# Altium PCB SJA1105Q_LAN8870_EVB_revA.PcbDoc (part 4 of 5)
Units mm, origin at the board's own origin, x right, y up, seen from the top; angles counter-clockwise.
Board outline 128 x 110 mm, 6 copper layers (Top Layer, Mid Layer 1, Mid Layer 2, Mid Layer 3, Mid Layer 4, Bottom Layer), stack 1.538 mm thick; 490 components, 327 nets, 1659 pads, 519 vias.
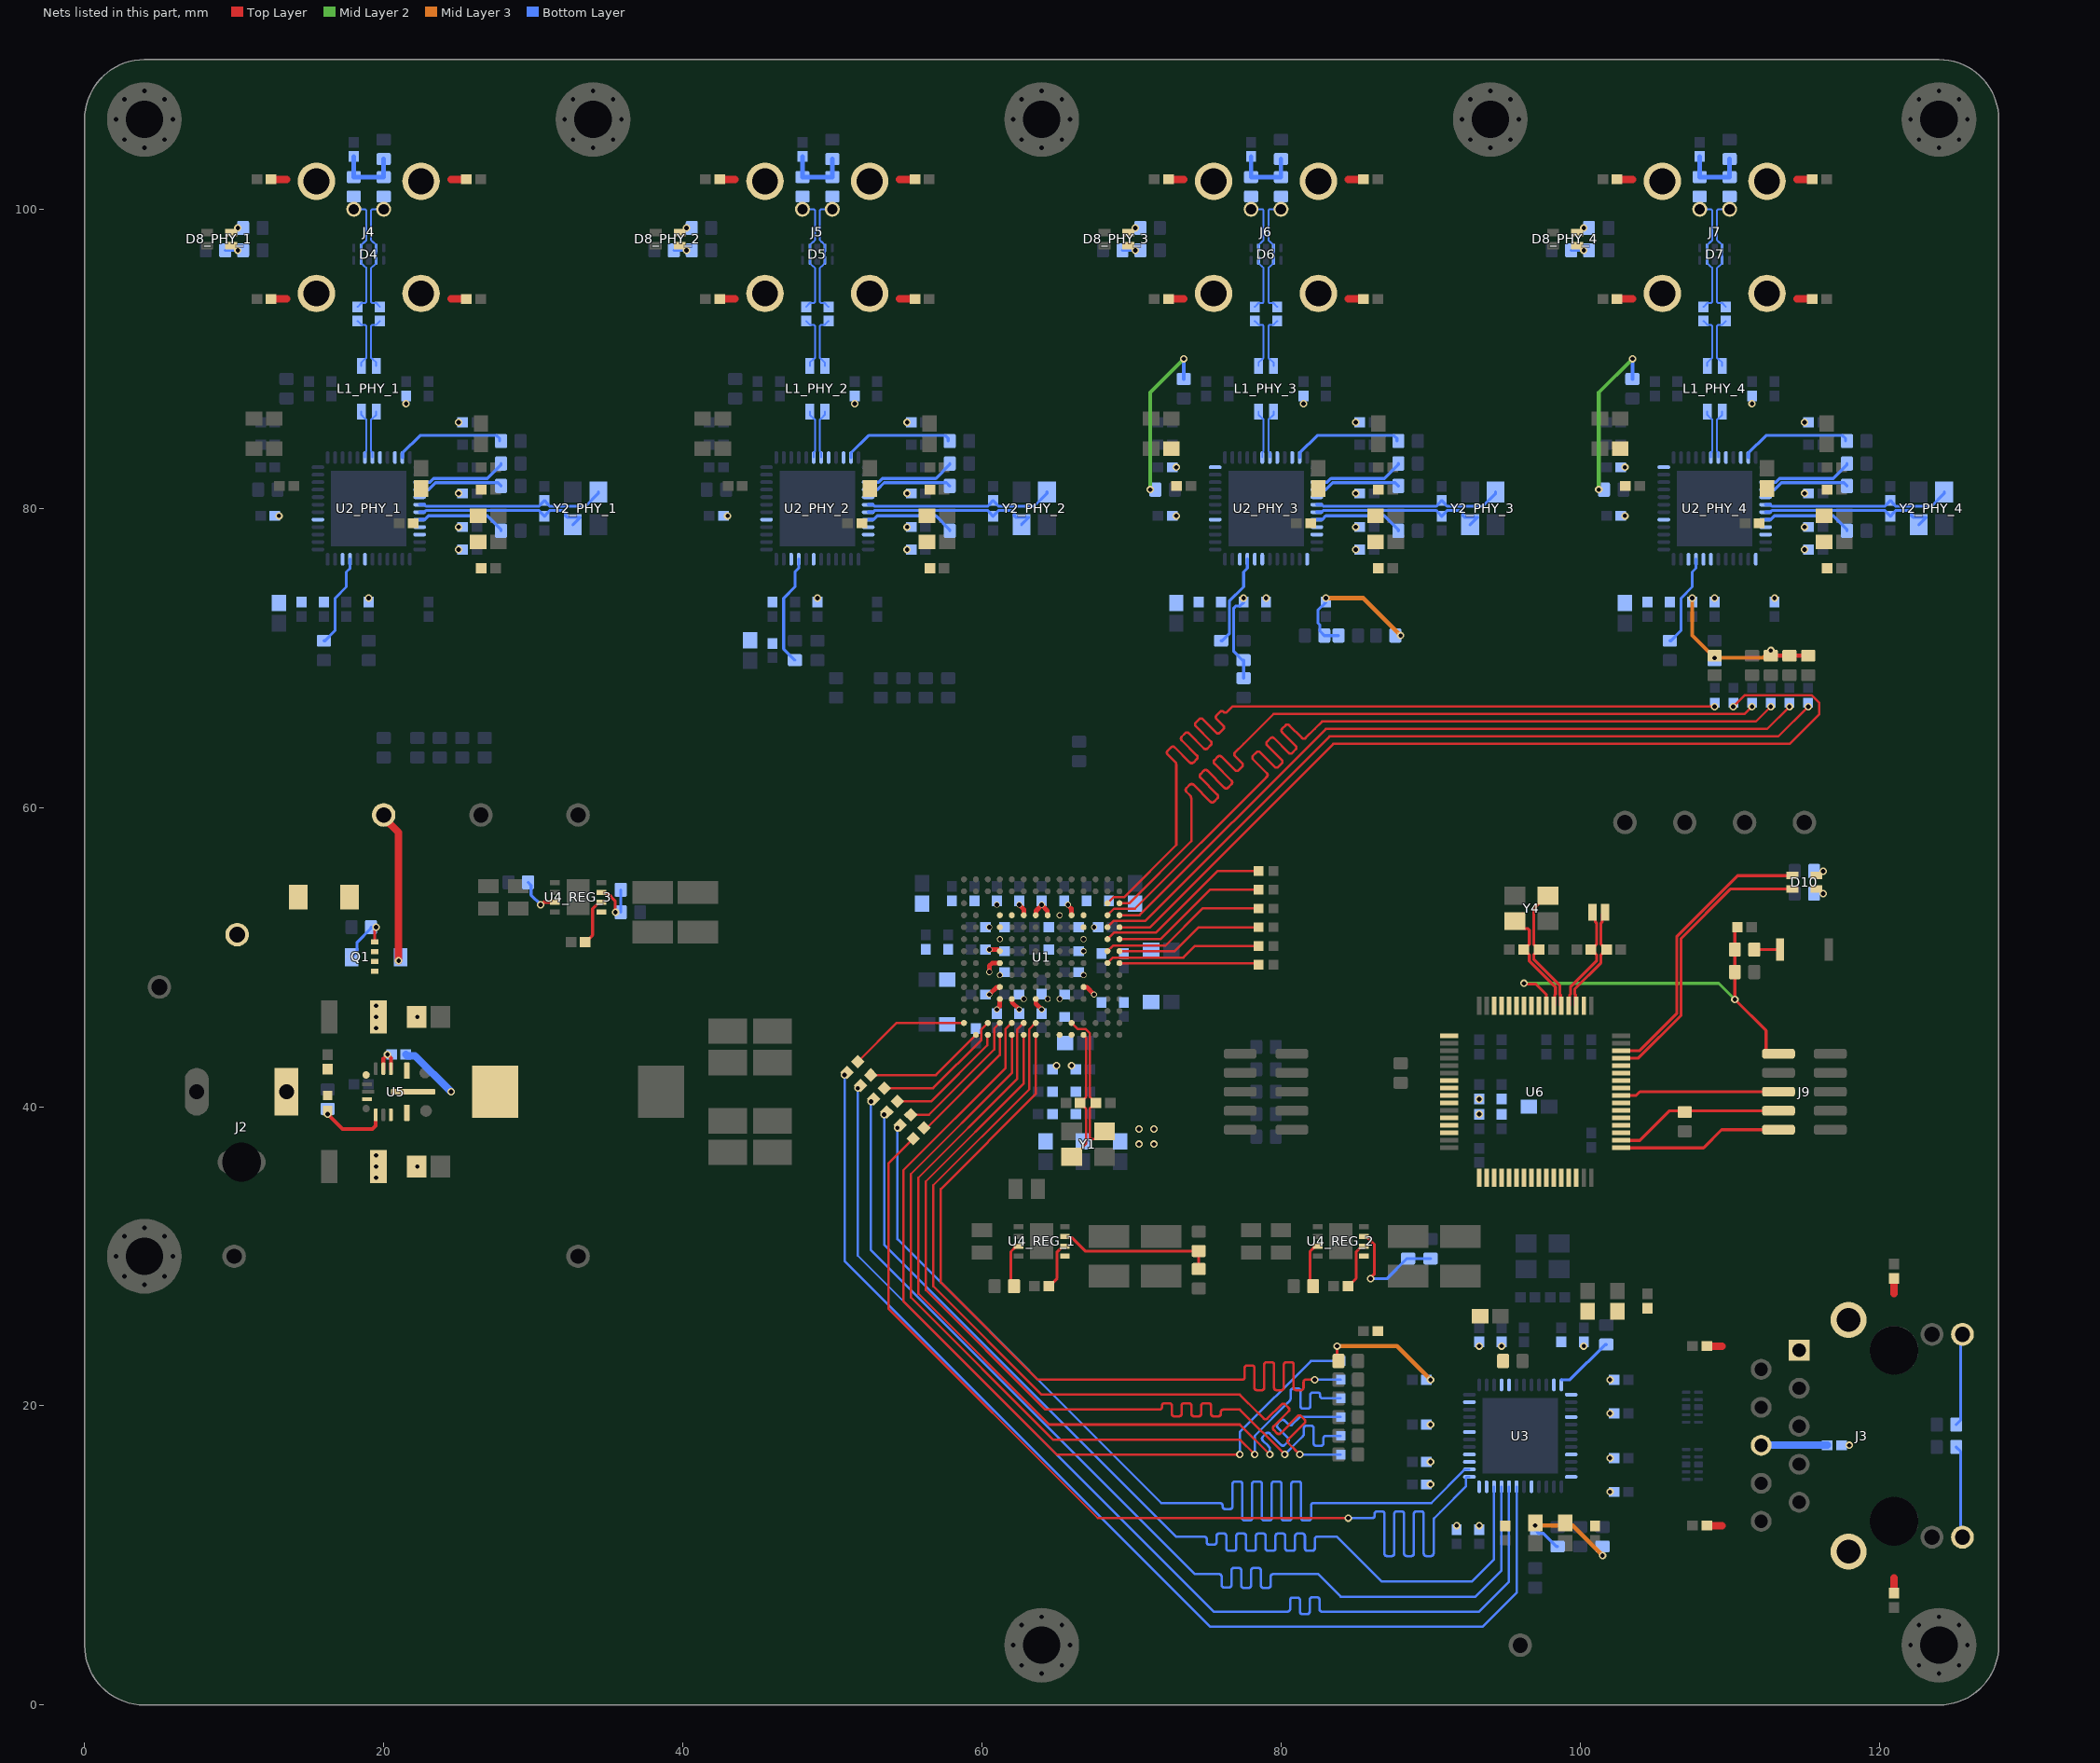
[diagram p8: the nets of this part, all layers, seen from the top]

## Via types
v1: diameter 0.5, hole 0.3, Top Layer to Bottom Layer, tented both sides, 469 vias
v2: diameter 0.4, hole 0.3, Top Layer to Bottom Layer, tented both sides, 44 vias
v3: diameter 0.66, hole 0.33, Top Layer to Bottom Layer, tented both sides, 6 vias

## Nets (pads, with @x,y where several pads share a name; then routed paths per layer and width w, separated by ;. In a path a pad name is that pad's centre, name@x,y a point inside that pad or via, vN(x,y) a via of type N, cw(c..) or ccw(c..) an arc to the next point about the centre after c; other vN are vias at no path point) (continued)
LAN8870_VDDIO_PHY_3: C89_PHY_3.1 C90_PHY_3.1 C91_PHY_3.1 C92_PHY_3.1 FB17_PHY_3.2 R14_PHY_3.1 R17_PHY_3.2 R18_PHY_3.1 R19_PHY_3.2 R20_PHY_3.2 R22_PHY_3.2 R24_PHY_3.2 U2_PHY_3.13 U2_PHY_3.20 U2_PHY_3.36 | length 26.5
  Mid Layer 2 w0.25: v1(71.25,81.25) 71.25,87.75 v1(73.5,90)
  Mid Layer 3 w0.3: v1(83,74) 85.5,74 v1(88,71.5)
  Bottom Layer w0.2: R18_PHY_3.1@77.5,68.65 R24_PHY_3.2@77.5,69.85 77.425,69.85 76.836,70.439 76.836,73.336 76.971,73.471 77.264,73.471 77.5,73.707 C92_PHY_3.1@77.5,73.729 ; C91_PHY_3.1@83,73.729 83,73.707 82.764,73.471 82.738,73.471 82.475,73.207 82.475,72.336 82.6,72.21 82.6,71.8 R19_PHY_3.2@82.9,71.5 R20_PHY_3.2@83.85,71.5
  Bottom Layer w0.25: R14_PHY_3.1@73.5,88.65 v1(73.5,90)
  other v1: 77.5,74 73,82.75
LAN8870_VDDIO_PHY_4: C89_PHY_4.1 C90_PHY_4.1 C91_PHY_4.1 C92_PHY_4.1 FB17_PHY_4.2 R14_PHY_4.1 R17_PHY_4.2 R18_PHY_4.1 R19_PHY_4.2 R20_PHY_4.2 R22_PHY_4.2 R24_PHY_4.2 U2_PHY_4.13 U2_PHY_4.20 U2_PHY_4.36 | length 22.3
  Top Layer w0.3: v1(112.75,70.5) 112.804,70.5 113.154,70.15 115.15,70.15 R22_PHY_4.2@115.25,70.25
  Mid Layer 2 w0.25: v1(101.25,81.25) 101.25,87.75 v1(103.5,90)
  Mid Layer 3 w0.25: v1(107.5,74) 107.5,71.5 v1(109,70) 112.25,70 v1(112.75,70.5)
  Bottom Layer w0.25: R14_PHY_4.1@103.5,88.65 v1(103.5,90)
  other v1: 113,74 103,82.75
LAN8870_X25_PHY_1_N: C69_PHY_1.1 U2_PHY_1.7 Y2_PHY_1.3 | length 12.2
  Bottom Layer w0.2: U2_PHY_1.7@22.4,79.75 22.714,79.75 22.819,79.856 30.397,79.856 30.514,79.738 30.514,79.715 C69_PHY_1.1@30.75,79.479 30.986,79.715 30.986,79.738 31.103,79.856 32.047,79.856 32.164,79.738 32.164,79.5 32.264,79.4 33.15,79.4 Y2_PHY_1.3@32.65,78.9
LAN8870_X25_PHY_1_P: C68_PHY_1.1 U2_PHY_1.6 Y2_PHY_1.1 | length 12.8
  Bottom Layer w0.2: U2_PHY_1.6@22.4,80.25 22.714,80.25 22.819,80.144 30.397,80.144 30.514,80.262 30.514,80.285 C68_PHY_1.1@30.75,80.521 30.986,80.285 30.986,80.262 31.103,80.144 33.494,80.144 34.35,81 Y2_PHY_1.1@34.35,81.1
LAN8870_X25_PHY_2_N: C69_PHY_2.1 U2_PHY_2.7 Y2_PHY_2.3 | length 12.2
  Bottom Layer w0.2: U2_PHY_2.7@52.4,79.75 52.714,79.75 52.819,79.856 60.397,79.856 60.514,79.738 60.514,79.715 C69_PHY_2.1@60.75,79.479 60.986,79.715 60.986,79.738 61.103,79.856 62.047,79.856 62.164,79.738 62.164,79.5 62.264,79.4 63.15,79.4 Y2_PHY_2.3@62.65,78.9
LAN8870_X25_PHY_2_P: C68_PHY_2.1 U2_PHY_2.6 Y2_PHY_2.1 | length 12.8
  Bottom Layer w0.2: U2_PHY_2.6@52.4,80.25 52.714,80.25 52.819,80.144 60.397,80.144 60.514,80.262 60.514,80.285 C68_PHY_2.1@60.75,80.521 60.986,80.285 60.986,80.262 61.103,80.144 63.494,80.144 64.35,81 Y2_PHY_2.1@64.35,81.1
LAN8870_X25_PHY_3_N: C69_PHY_3.1 U2_PHY_3.7 Y2_PHY_3.3 | length 12.2
  Bottom Layer w0.2: U2_PHY_3.7@82.4,79.75 82.714,79.75 82.819,79.856 90.397,79.856 90.514,79.738 90.514,79.715 C69_PHY_3.1@90.75,79.479 90.986,79.715 90.986,79.738 91.103,79.856 92.047,79.856 92.164,79.738 92.164,79.5 92.264,79.4 93.15,79.4 Y2_PHY_3.3@92.65,78.9
LAN8870_X25_PHY_3_P: C68_PHY_3.1 U2_PHY_3.6 Y2_PHY_3.1 | length 12.8
  Bottom Layer w0.2: U2_PHY_3.6@82.4,80.25 82.714,80.25 82.819,80.144 90.397,80.144 90.514,80.262 90.514,80.285 C68_PHY_3.1@90.75,80.521 90.986,80.285 90.986,80.262 91.103,80.144 93.494,80.144 94.35,81 Y2_PHY_3.1@94.35,81.1
LAN8870_X25_PHY_4_N: C69_PHY_4.1 U2_PHY_4.7 Y2_PHY_4.3 | length 12.2
  Bottom Layer w0.2: U2_PHY_4.7@112.4,79.75 112.714,79.75 112.819,79.856 120.397,79.856 120.514,79.738 120.514,79.715 C69_PHY_4.1@120.75,79.479 120.986,79.715 120.986,79.738 121.103,79.856 122.047,79.856 122.164,79.738 122.164,79.5 122.264,79.4 123.15,79.4 Y2_PHY_4.3@122.65,78.9
LAN8870_X25_PHY_4_P: C68_PHY_4.1 U2_PHY_4.6 Y2_PHY_4.1 | length 12.8
  Bottom Layer w0.2: U2_PHY_4.6@112.4,80.25 112.714,80.25 112.819,80.144 120.397,80.144 120.514,80.262 120.514,80.285 C68_PHY_4.1@120.75,80.521 120.986,80.285 120.986,80.262 121.103,80.144 123.494,80.144 124.35,81 Y2_PHY_4.1@124.35,81.1
LM61495Q3_VCC: C130.2 R48.1 U5.6 U5.9
NetC1_1: C1.1 J3.P6 | length 4.4
  Bottom Layer w0.5: J3.P6@112.11,17.365 C1.1@116.521,17.365
NetC66_PHY_1_2: C66_PHY_1.2 R11_PHY_1.1 R12_PHY_1.1 R13_PHY_1.1 | length 4.6
  Bottom Layer w0.3: C66_PHY_1.2@18,103.521 R11_PHY_1.1@18,102.15 R12_PHY_1.1@20,102.15 R13_PHY_1.1@20,103.35
NetC66_PHY_2_2: C66_PHY_2.2 R11_PHY_2.1 R12_PHY_2.1 R13_PHY_2.1 | length 4.6
  Bottom Layer w0.3: C66_PHY_2.2@48,103.521 R11_PHY_2.1@48,102.15 R12_PHY_2.1@50,102.15 R13_PHY_2.1@50,103.35
NetC66_PHY_3_2: C66_PHY_3.2 R11_PHY_3.1 R12_PHY_3.1 R13_PHY_3.1 | length 4.6
  Bottom Layer w0.3: C66_PHY_3.2@78,103.521 R11_PHY_3.1@78,102.15 R12_PHY_3.1@80,102.15 R13_PHY_3.1@80,103.35
NetC66_PHY_4_2: C66_PHY_4.2 R11_PHY_4.1 R12_PHY_4.1 R13_PHY_4.1 | length 4.6
  Bottom Layer w0.3: C66_PHY_4.2@108,103.521 R11_PHY_4.1@108,102.15 R12_PHY_4.1@110,102.15 R13_PHY_4.1@110,103.35
NetC70_PHY_1_1: C70_PHY_1.1 C71_PHY_1.1 FB11_PHY_1.2 U2_PHY_1.9
  other v1: 25,78.75
NetC70_PHY_2_1: C70_PHY_2.1 C71_PHY_2.1 FB11_PHY_2.2 U2_PHY_2.9
  other v1: 55,78.75
NetC70_PHY_3_1: C70_PHY_3.1 C71_PHY_3.1 FB11_PHY_3.2 U2_PHY_3.9
  other v1: 85,78.75
NetC70_PHY_4_1: C70_PHY_4.1 C71_PHY_4.1 FB11_PHY_4.2 U2_PHY_4.9
  other v1: 115,78.75
NetC72_PHY_1_1: C72_PHY_1.1 C73_PHY_1.1 C74_PHY_1.1 C75_PHY_1.1 FB12_PHY_1.2 U2_PHY_1.10 U2_PHY_1.19 U2_PHY_1.29
  other v1: 19,74 25,77.25 13,79.5
NetC72_PHY_2_1: C72_PHY_2.1 C73_PHY_2.1 C74_PHY_2.1 C75_PHY_2.1 FB12_PHY_2.2 U2_PHY_2.10 U2_PHY_2.19 U2_PHY_2.29
  other v1: 49,74 55,77.25 43,79.5
NetC72_PHY_3_1: C72_PHY_3.1 C73_PHY_3.1 C74_PHY_3.1 C75_PHY_3.1 FB12_PHY_3.2 U2_PHY_3.10 U2_PHY_3.19 U2_PHY_3.29
  other v1: 79,74 85,77.25 73,79.5
NetC72_PHY_4_1: C72_PHY_4.1 C73_PHY_4.1 C74_PHY_4.1 C75_PHY_4.1 FB12_PHY_4.2 U2_PHY_4.10 U2_PHY_4.19 U2_PHY_4.29
  other v1: 109,74 115,77.25 103,79.5
NetC76_PHY_1_1: C76_PHY_1.1 C77_PHY_1.1 C78_PHY_1.1 C79_PHY_1.1 FB13_PHY_1.2 U2_PHY_1.5 U2_PHY_1.44 U2_PHY_1.46
  other v1: 25,81 25,85.75 21.5,87
NetC76_PHY_2_1: C76_PHY_2.1 C77_PHY_2.1 C78_PHY_2.1 C79_PHY_2.1 FB13_PHY_2.2 U2_PHY_2.5 U2_PHY_2.44 U2_PHY_2.46
  other v1: 55,81 55,85.75 51.5,87
NetC76_PHY_3_1: C76_PHY_3.1 C77_PHY_3.1 C78_PHY_3.1 C79_PHY_3.1 FB13_PHY_3.2 U2_PHY_3.5 U2_PHY_3.44 U2_PHY_3.46
  other v1: 85,81 85,85.75 81.5,87
NetC76_PHY_4_1: C76_PHY_4.1 C77_PHY_4.1 C78_PHY_4.1 C79_PHY_4.1 FB13_PHY_4.2 U2_PHY_4.5 U2_PHY_4.44 U2_PHY_4.46
  other v1: 115,81 115,85.75 111.5,87
NetC80_PHY_1_1: C80_PHY_1.1 C81_PHY_1.1 FB14_PHY_1.1 U2_PHY_1.22
NetC80_PHY_2_1: C80_PHY_2.1 C81_PHY_2.1 FB14_PHY_2.1 U2_PHY_2.22
NetC80_PHY_3_1: C80_PHY_3.1 C81_PHY_3.1 FB14_PHY_3.1 U2_PHY_3.22
NetC80_PHY_4_1: C80_PHY_4.1 C81_PHY_4.1 FB14_PHY_4.1 U2_PHY_4.22
NetC102_1: C102.1 C103.1 C104.1 C105.1 C106.1 FB19.2 U3.23 U3.27 U3.31 U3.40
  other v1: 93.25,12 90,14.75 90,18.75 93.25,24
NetC107_1: C107.1 C108.1 FB20.2 U3.47
  other v1: 100.25,24
NetC109_1: C109.1 C110.1 C111.1 FB21.2 U3.1 U3.12
  other v1: 102,14.25 102,21.75
NetC112_1: C112.1 C113.1 C114.1 FB22.2 U3.4 U3.9
  other v1: 102,16.5 102,19.5
NetC119_REG_1_1: C119_REG_1.1 U4_REG_1.6 | length 3.2
  Top Layer w0.2: C119_REG_1.1@64.479,28 64.5,28 65.031,28.531 65.031,30.306 65.4,30.675 U4_REG_1.6@65.55,30.675
NetC119_REG_2_1: C119_REG_2.1 U4_REG_2.6 | length 3.2
  Top Layer w0.2: C119_REG_2.1@84.479,28 84.5,28 85.031,28.531 85.031,30.306 85.4,30.675 U4_REG_2.6@85.55,30.675
NetC119_REG_3_1: C119_REG_3.1 U4_REG_3.6 | length 3.2
  Top Layer w0.2: C119_REG_3.1@33.479,51 33.5,51 33.964,51.464 33.964,53.239 34.4,53.675 U4_REG_3.6@34.55,53.675
NetC120_1: C120.1 U5.3 U5.4 | length 2.1
  Top Layer w0.25: U5.4@19.975,42.538 19.975,43.225 v1(20.25,43.5) 20.25,43.463 20.475,43.238 U5.3@20.475,42.538
NetC120_2: C120.2 L2.1 U5.16 | length 4.1
  Bottom Layer w0.5: C120.2@21.479,43.5 21.565,43.414 22.086,43.414 v1(24.5,41)
NetD1_2: D1.2 Q1.4 R1.2 | length 3.9
  Top Layer w0.2: Q1.4@19.4,51.013 19.4,51.819 19.5,51.919 v1(19.5,52)
  Bottom Layer w0.2: D1.2@17.865,50 18.22,50.355 18.22,50.995 19.15,51.925 R1.2@19.15,52 v1(19.5,52)
NetD8_PHY_1_1: D8_PHY_1.1 R21_PHY_1.1
  other v1: 10.25,98.75
NetD8_PHY_1_4: D8_PHY_1.4 R23_PHY_1.1 R25_PHY_1.1 | length 0.9
  Bottom Layer w0.2: R25_PHY_1.1@9.4,97.25 v1(10.25,97.25)
NetD8_PHY_2_1: D8_PHY_2.1 R21_PHY_2.1
  other v1: 40.25,98.75
NetD8_PHY_2_4: D8_PHY_2.4 R23_PHY_2.1 R25_PHY_2.1 | length 0.9
  Bottom Layer w0.2: R25_PHY_2.1@39.4,97.25 v1(40.25,97.25)
NetD8_PHY_3_1: D8_PHY_3.1 R21_PHY_3.1
  other v1: 70.25,98.75
NetD8_PHY_3_4: D8_PHY_3.4 R23_PHY_3.1 R25_PHY_3.1 | length 0.9
  Bottom Layer w0.2: R25_PHY_3.1@69.4,97.25 v1(70.25,97.25)
NetD8_PHY_4_1: D8_PHY_4.1 R21_PHY_4.1
  other v1: 100.25,98.75
NetD8_PHY_4_4: D8_PHY_4.4 R23_PHY_4.1 R25_PHY_4.1 | length 0.9
  Bottom Layer w0.2: R25_PHY_4.1@99.4,97.25 v1(100.25,97.25)
NetD10_2: D10.2 R50.1
  other v1: 116.25,54.25
NetD10_3: D10.3 R51.1
  other v1: 116.25,55.75
NetF1_1: F1.1 J1.1 J2.1
NetF1_2: F1.2 Q1.5-6-7-8
NetJ3_L1: J3.L1 R3.2 | length 6.2
  Bottom Layer w0.2: R3.2@125.15,17.25 125.45,16.95 125.45,11.335 J3.L1@125.57,11.215
NetJ3_L3: J3.L3 R2.2 | length 6.2
  Bottom Layer w0.2: R2.2@125.15,18.75 125.45,19.05 125.45,24.665 J3.L3@125.57,24.785
NetR15_PHY_1_1: R15_PHY_1.1 U2_PHY_1.4 | length 5.7
  Bottom Layer w0.2: U2_PHY_1.4@22.4,81.25 23,81.25 23.461,81.711 27.639,81.711 R15_PHY_1.1@27.85,81.5
NetR15_PHY_2_1: R15_PHY_2.1 U2_PHY_2.4 | length 5.7
  Bottom Layer w0.2: U2_PHY_2.4@52.4,81.25 53,81.25 53.461,81.711 57.639,81.711 R15_PHY_2.1@57.85,81.5
NetR15_PHY_3_1: R15_PHY_3.1 U2_PHY_3.4 | length 5.7
  Bottom Layer w0.2: U2_PHY_3.4@82.4,81.25 83,81.25 83.461,81.711 87.639,81.711 R15_PHY_3.1@87.85,81.5
NetR15_PHY_4_1: R15_PHY_4.1 U2_PHY_4.4 | length 5.7
  Bottom Layer w0.2: U2_PHY_4.4@112.4,81.25 113,81.25 113.461,81.711 117.639,81.711 R15_PHY_4.1@117.85,81.5
NetR16_PHY_1_1: R16_PHY_1.1 U2_PHY_1.8 | length 6
  Bottom Layer w0.2: U2_PHY_1.8@22.4,79.25 22.41,79.26 22.76,79.26 23,79.5 26.925,79.5 27.85,78.575 R16_PHY_1.1@27.85,78.5
NetR16_PHY_2_1: R16_PHY_2.1 U2_PHY_2.8 | length 6
  Bottom Layer w0.2: U2_PHY_2.8@52.4,79.25 52.41,79.26 52.76,79.26 53,79.5 56.925,79.5 57.85,78.575 R16_PHY_2.1@57.85,78.5
NetR16_PHY_3_1: R16_PHY_3.1 U2_PHY_3.8 | length 6
  Bottom Layer w0.2: U2_PHY_3.8@82.4,79.25 82.41,79.26 82.76,79.26 83,79.5 86.925,79.5 87.85,78.575 R16_PHY_3.1@87.85,78.5
NetR16_PHY_4_1: R16_PHY_4.1 U2_PHY_4.8 | length 6
  Bottom Layer w0.2: U2_PHY_4.8@112.4,79.25 112.41,79.26 112.76,79.26 113,79.5 116.925,79.5 117.85,78.575 R16_PHY_4.1@117.85,78.5
NetR27_PHY_1_1: R27_PHY_1.1 U2_PHY_1.3 | length 6
  Bottom Layer w0.2: U2_PHY_1.3@22.4,81.75 23.091,81.75 23.341,82 26.925,82 27.85,82.925 R27_PHY_1.1@27.85,83
NetR27_PHY_2_1: R27_PHY_2.1 U2_PHY_2.3 | length 6
  Bottom Layer w0.2: U2_PHY_2.3@52.4,81.75 53.091,81.75 53.341,82 56.925,82 57.85,82.925 R27_PHY_2.1@57.85,83
NetR27_PHY_3_1: R27_PHY_3.1 U2_PHY_3.3 | length 6
  Bottom Layer w0.2: U2_PHY_3.3@82.4,81.75 83.091,81.75 83.341,82 86.925,82 87.85,82.925 R27_PHY_3.1@87.85,83
NetR27_PHY_4_1: R27_PHY_4.1 U2_PHY_4.3 | length 6
  Bottom Layer w0.2: U2_PHY_4.3@112.4,81.75 113.091,81.75 113.341,82 116.925,82 117.85,82.925 R27_PHY_4.1@117.85,83
NetR28_PHY_1_1: R28_PHY_1.1 U2_PHY_1.47 | length 7.5
  Bottom Layer w0.2: U2_PHY_1.47@21.25,83.4 21.25,83.7 22.425,84.875 27.55,84.875 27.75,84.675 R28_PHY_1.1@27.75,84.5
NetR28_PHY_2_1: R28_PHY_2.1 U2_PHY_2.47 | length 7.5
  Bottom Layer w0.2: U2_PHY_2.47@51.25,83.4 51.25,83.7 52.425,84.875 57.55,84.875 57.75,84.675 R28_PHY_2.1@57.75,84.5
NetR28_PHY_3_1: R28_PHY_3.1 U2_PHY_3.47 | length 7.5
  Bottom Layer w0.2: U2_PHY_3.47@81.25,83.4 81.25,83.7 82.425,84.875 87.55,84.875 87.75,84.675 R28_PHY_3.1@87.75,84.5
NetR28_PHY_4_1: R28_PHY_4.1 U2_PHY_4.47 | length 7.5
  Bottom Layer w0.2: U2_PHY_4.47@111.25,83.4 111.25,83.7 112.425,84.875 117.55,84.875 117.75,84.675 R28_PHY_4.1@117.75,84.5
NetR29_PHY_1_1: R29_PHY_1.1 U2_PHY_1.21 | length 6.2
  Bottom Layer w0.2: R29_PHY_1.1@16,71.15 16.075,71.15 16.75,71.825 16.75,74 17.5,74.75 17.5,75.75 17.75,76 U2_PHY_1.21@17.75,76.6
NetR29_PHY_2_1: R29_PHY_2.1 U2_PHY_2.21 | length 7.5
  Bottom Layer w0.2: R29_PHY_2.1@47.5,69.85 46.75,70.6 46.75,74 47.5,74.75 47.5,75.75 47.75,76 U2_PHY_2.21@47.75,76.6
NetR29_PHY_3_1: R29_PHY_3.1 U2_PHY_3.21 | length 6.2
  Bottom Layer w0.2: R29_PHY_3.1@76,71.15 76.075,71.15 76.547,71.622 76.547,73.797 77.5,74.75 77.5,75.75 77.75,76 U2_PHY_3.21@77.75,76.6
NetR29_PHY_4_1: R29_PHY_4.1 U2_PHY_4.21 | length 6.2
  Bottom Layer w0.2: R29_PHY_4.1@106,71.15 106.075,71.15 106.75,71.825 106.75,74 107.5,74.75 107.5,75.75 107.75,76 U2_PHY_4.21@107.75,76.6
NetR38_1: R38.1 U3.19 | length 75.5
  Bottom Layer w0.156: v1(50.818,42.121) 50.818,29.682 75.25,5.25 93.5,5.25 95.75,7.5 U3.19@95.75,14.6
NetR38_2: R38.2 U1.A2 | length 8.2
  Top Layer w0.156: R38.2@51.702,43.005 54.297,45.6 U1.A2@58.8,45.6
NetR40_1: R40.1 U3.20 | length 75.3
  Bottom Layer w0.156: v1(51.702,41.237) 51.702,30.048 75.5,6.25 79.469,6.25 80.444,6.25 ccw(c80.444,6.414) 80.608,6.414 80.608,7.018 cw(c80.772,7.018) 80.772,7.182 81.1,7.182 cw(c81.1,7.018) 81.265,7.018 81.265,6.243 ccw(c81.429,6.243) 81.429,6.079 81.757,6.079 ccw(c81.757,6.243) 81.921,6.243 81.921,7.039 cw(c82.085,7.039) 82.085,7.203 82.413,7.203 cw(c82.413,7.039) 82.578,7.039 82.578,6.414 ccw(c82.742,6.414) 82.742,6.25 83.476,6.25 93.25,6.25 95.25,8.25 U3.20@95.25,14.6
NetR40_2: R40.2 U1.B1 | length 8.1
  Top Layer w0.156: R40.2@52.586,42.121 56.921,42.121 U1.B1@59.6,44.8
NetR43_1: R43.1 U3.48 | length 4
  Bottom Layer w0.2: U3.48@98.75,21.75 99.325,21.75 101.675,24.1 R43.1@101.75,24.1
NetR44_REG_1_1: R44_REG_1.1 R46_REG_1.2 U4_REG_1.7 | length 10.6
  Top Layer w0.2: U4_REG_1.7@65.55,31.325 65.625,31.25 66,31.25 66.9,30.35 R44_REG_1.1@74.5,30.35 R46_REG_1.2@74.5,29.15
NetR44_REG_2_1: R44_REG_2.1 R46_REG_2.2 U4_REG_2.7 | length 7.9
  Top Layer w0.2: U4_REG_2.7@85.55,31.325 85.7,31.325 86.25,30.775 86.25,28.831 86,28.581 v1(86,28.5)
  Bottom Layer w0.2: v1(86,28.5) 87.075,28.5 88.425,29.85 R44_REG_2.1@88.5,29.85 R46_REG_2.2@90,29.85
NetR44_REG_3_1: R44_REG_3.1 R46_REG_3.2 U4_REG_3.7 | length 3.4
  Top Layer w0.2: U4_REG_3.7@34.55,54.325 34.625,54.25 35,54.25 35.475,53.775 35.475,53.025 v1(35.5,53)
  Bottom Layer w0.2: R46_REG_3.2@35.85,53 R44_REG_3.1@35.85,54.5
NetR45_REG_1_2: R45_REG_1.2 U4_REG_1.3 | length 3.1
  Top Layer w0.2: R45_REG_1.2@62.15,28 61.936,28.214 61.936,30.311 62.3,30.675 U4_REG_1.3@62.45,30.675
NetR45_REG_2_2: R45_REG_2.2 U4_REG_2.3 | length 3.1
  Top Layer w0.2: R45_REG_2.2@82.15,28 81.936,28.214 81.936,30.311 82.3,30.675 U4_REG_2.3@82.45,30.675
NetR45_REG_3_2: R45_REG_3.2 U4_REG_3.3 | length 2.9
  Top Layer w0.25: v1(30.5,53.5) 30.568,53.5 30.743,53.675 U4_REG_3.3@31.45,53.675
  Bottom Layer w0.2: R45_REG_3.2@29.65,55 29.856,54.794 29.856,54.144 v1(30.5,53.5)
NetR47_1: R47.1 R48.2 U5.11 | length 4.7
  Top Layer w0.25: R48.2@16.25,39.75 v1(16.25,39.5) 17.25,38.5 19.25,38.5 19.475,38.725 U5.11@19.475,39.462
NetR53_2: R53.2 SW1.1 | length 1.7
  Top Layer w0.2: R53.2@111.65,50.5 SW1.1@113.375,50.5
NetR55_1: R55.1 U3.21 | length 74.3
  Bottom Layer w0.156: v1(52.586,40.354) 52.586,30.414 74.25,8.75 75.511,8.75 75.866,8.75 cw(c75.866,8.586) 76.031,8.586 76.031,8.025 ccw(c76.195,8.025) 76.195,7.861 76.523,7.861 ccw(c76.523,8.025) 76.687,8.025 76.687,9.004 cw(c76.851,9.004) 76.851,9.168 77.179,9.168 cw(c77.179,9.004) 77.344,9.004 77.344,7.996 ccw(c77.508,7.996) 77.508,7.832 77.836,7.832 ccw(c77.836,7.996) 78,7.996 78,9.004 cw(c78.164,9.004) 78.164,9.168 78.492,9.168 cw(c78.492,9.004) 78.656,9.004 78.656,7.996 ccw(c78.821,7.996) 78.821,7.832 79.149,7.832 ccw(c79.149,7.996) 79.313,7.996 79.313,8.586 cw(c79.477,8.586) 79.477,8.75 79.555,8.75 82.5,8.75 84,7.25 93,7.25 94.75,9 U3.21@94.75,14.6
NetR55_2: R55.2 U1.C2 | length 9.1
  Top Layer w0.156: R55.2@53.47,41.237 56.737,41.237 59.967,44.467 59.967,45.167 U1.C2@60.4,45.6
NetR56_1: R56.1 U3.22 | length 75.2
  Bottom Layer w0.156: v1(53.47,39.47) 53.47,30.78 73,11.25 74.512,11.25 74.872,11.25 cw(c74.872,11.086) 75.036,11.086 75.036,10.888 ccw(c75.2,10.888) 75.2,10.724 75.529,10.724 ccw(c75.529,10.888) 75.693,10.888 75.693,11.296 cw(c75.857,11.296) 75.857,11.46 76.185,11.46 cw(c76.185,11.296) 76.349,11.296 76.349,10.469 ccw(c76.513,10.469) 76.513,10.305 76.841,10.305 ccw(c76.841,10.469) 77.006,10.469 77.006,11.296 cw(c77.17,11.296) 77.17,11.46 77.498,11.46 cw(c77.498,11.296) 77.662,11.296 77.662,10.469 ccw(c77.826,10.469) 77.826,10.305 78.154,10.305 ccw(c78.154,10.469) 78.319,10.469 78.319,11.296 cw(c78.483,11.296) 78.483,11.46 78.811,11.46 cw(c78.811,11.296) 78.975,11.296 78.975,10.469 ccw(c79.139,10.469) 79.139,10.305 79.467,10.305 ccw(c79.467,10.469) 79.632,10.469 79.632,11.296 cw(c79.796,11.296) 79.796,11.46 80.124,11.46 cw(c80.124,11.296) 80.288,11.296 80.288,10.469 ccw(c80.452,10.469) 80.452,10.305 80.78,10.305 ccw(c80.78,10.469) 80.945,10.469 80.945,11.296 cw(c81.109,11.296) 81.109,11.46 81.437,11.46 cw(c81.437,11.296) 81.601,11.296 81.601,10.469 ccw(c81.765,10.469) 81.765,10.305 82.093,10.305 ccw(c82.093,10.469) 82.258,10.469 82.258,11.086 cw(c82.422,11.086) 82.422,11.25 82.5,11.25 83.75,11.25 86.75,8.25 92.75,8.25 94.25,9.75 U3.22@94.25,14.6
NetR56_2: R56.2 U1.C1 | length 8.3
  Top Layer w0.156: R56.2@54.354,40.354 56.604,40.354 60.365,44.115 60.365,44.765 U1.C1@60.4,44.8
NetR57_1: R57.1 U3.25 | length 75.2
  Top Layer w0.156: R57.1@55.414,37.879 53.75,36.214 53.75,26.5 67.75,12.5 v1(84.5,12.5)
  Bottom Layer w0.156: v1(84.5,12.5) 86.022,12.5 86.1,12.5 ccw(c86.1,12.664) 86.265,12.664 86.265,12.781 cw(c86.429,12.781) 86.429,12.945 86.757,12.945 cw(c86.757,12.781) 86.921,12.781 86.921,10.124 ccw(c87.085,10.124) 87.085,9.96 87.413,9.96 ccw(c87.413,10.124) 87.578,10.124 87.578,12.781 cw(c87.742,12.781) 87.742,12.945 88.07,12.945 cw(c88.07,12.781) 88.234,12.781 88.234,10.124 ccw(c88.398,10.124) 88.398,9.96 88.726,9.96 ccw(c88.726,10.124) 88.891,10.124 88.891,12.781 cw(c89.055,12.781) 89.055,12.945 89.383,12.945 cw(c89.383,12.781) 89.547,12.781 89.547,10.124 ccw(c89.711,10.124) 89.711,9.96 90.039,9.96 ccw(c90.039,10.124) 90.204,10.124 90.204,12.386 cw(c90.368,12.386) 90.252,12.502 90.658,12.908 92.378,14.628 92.378,15.207 92.421,15.25 U3.25@92.6,15.25
NetR57_2: R57.2 U1.D1 | length 8.4
  Top Layer w0.156: R57.2@56.121,38.586 56.336,38.586 61.2,43.45 U1.D1@61.2,44.8
NetR58_1: R58.1 U3.26 | length 74.2
  Bottom Layer w0.156: v1(54.354,38.586) 54.354,31.146 72,13.5 75.476,13.5 75.935,13.5 cw(c75.935,13.336) 76.099,13.336 76.099,13.267 ccw(c76.263,13.267) 76.263,13.103 76.592,13.103 ccw(c76.592,13.267) 76.756,13.267 76.756,14.775 cw(c76.92,14.775) 76.92,14.939 77.248,14.939 cw(c77.248,14.775) 77.412,14.775 77.412,12.499 ccw(c77.576,12.499) 77.576,12.334 77.904,12.334 ccw(c77.904,12.499) 78.069,12.499 78.069,14.775 cw(c78.233,14.775) 78.233,14.939 78.561,14.939 cw(c78.561,14.775) 78.725,14.775 78.725,12.499 ccw(c78.889,12.499) 78.889,12.334 79.217,12.334 ccw(c79.217,12.499) 79.382,12.499 79.382,14.775 cw(c79.546,14.775) 79.546,14.939 79.874,14.939 cw(c79.874,14.775) 80.038,14.775 80.038,12.499 ccw(c80.202,12.499) 80.202,12.334 80.53,12.334 ccw(c80.53,12.499) 80.695,12.499 80.695,14.775 cw(c80.859,14.775) 80.859,14.939 81.187,14.939 cw(c81.187,14.775) 81.351,14.775 81.351,12.499 ccw(c81.515,12.499) 81.515,12.334 81.843,12.334 ccw(c81.843,12.499) 82.008,12.499 82.008,13.336 cw(c82.172,13.336) 82.172,13.5 82.25,13.5 90.05,13.5 92.3,15.75 U3.26@92.6,15.75
NetR58_2: R58.2 U1.D2 | length 9.3
  Top Layer w0.156: R58.2@55.237,39.47 56.47,39.47 60.833,43.833 60.833,45.233 U1.D2@61.2,45.6
NetR59_2: R59.2 U1.E1 | length 58.7
  Top Layer w0.156: U1.E1@62,44.8 62,42.25 55.25,35.5 55.25,27.25 64.75,17.75 77.25,17.75 v1(78.25,16.75)
  Bottom Layer w0.156: v1(78.25,16.75) 78.25,18 80.487,20.237 80.565,20.315 ccw(c80.367,20.513) 80.566,20.316 ccw(c80.367,20.513) 80.647,20.513 80.647,20.99 cw(c80.811,20.99) 80.811,21.154 81.14,21.154 cw(c81.14,20.99) 81.304,20.99 81.304,19.977 ccw(c81.468,19.977) 81.468,19.813 81.796,19.813 ccw(c81.796,19.977) 81.96,19.977 81.96,20.726 cw(c82.124,20.726) 82.124,20.891 82.453,20.891 cw(c82.453,20.726) 82.617,20.726 82.617,20.664 ccw(c82.781,20.664) 82.781,20.5 83.5,20.5 R59.2@84,20.5
NetR60_2: R60.2 U1.F2 | length 58.9
  Top Layer w0.156: U1.F2@62.8,45.6 62.367,45.167 62.367,41.867 55.75,35.25 55.75,27.5 64.5,18.75 77.25,18.75 v1(79.25,16.75)
  Bottom Layer w0.156: v1(79.25,16.75) 79.25,16.995 79.25,17.105 ccw(c78.97,17.105) 79.168,17.303 78.778,17.694 cw(c78.894,17.81) 78.778,17.926 79.01,18.158 cw(c79.126,18.042) 79.242,18.158 80.013,17.387 ccw(c80.129,17.503) 80.245,17.387 80.477,17.619 ccw(c80.361,17.735) 80.477,17.851 79.765,18.563 cw(c79.881,18.679) 79.765,18.795 79.997,19.028 cw(c80.113,18.912) 80.229,19.028 80.512,18.744 ccw(c80.628,18.861) 80.744,18.744 81.25,19.25 81.519,19.25 R60.2@84,19.25
NetR61_2: R61.2 U1.F1 | length 59.1
  Top Layer w0.156: U1.F1@62.8,44.8 62.8,41.55 56.25,35 56.25,27.75 64.25,19.75 71.25,19.75 71.877,19.75 ccw(c71.877,19.914) 72.041,19.914 72.041,20.009 cw(c72.205,20.009) 72.205,20.173 72.533,20.173 cw(c72.533,20.009) 72.697,20.009 72.697,19.47 ccw(c72.862,19.47) 72.862,19.306 73.19,19.306 ccw(c73.19,19.47) 73.354,19.47 73.354,20.009 cw(c73.518,20.009) 73.518,20.173 73.846,20.173 cw(c73.846,20.009) 74.01,20.009 74.01,19.47 ccw(c74.175,19.47) 74.175,19.306 74.503,19.306 ccw(c74.503,19.47) 74.667,19.47 74.667,20.009 cw(c74.831,20.009) 74.831,20.173 75.159,20.173 cw(c75.159,20.009) 75.323,20.009 75.323,19.47 ccw(c75.488,19.47) 75.488,19.306 75.816,19.306 ccw(c75.816,19.47) 75.98,19.47 75.98,19.586 cw(c76.144,19.586) 76.144,19.75 76.222,19.75 77.25,19.75 v1(80.25,16.75)
  Bottom Layer w0.156: v1(80.25,16.75) 81.368,17.868 81.446,17.946 ccw(c81.248,18.144) 81.528,18.144 81.528,18.504 cw(c81.692,18.504) 81.692,18.668 82.02,18.668 cw(c82.02,18.504) 82.184,18.504 82.184,17.497 ccw(c82.349,17.497) 82.349,17.333 82.677,17.333 ccw(c82.677,17.497) 82.841,17.497 82.841,17.836 cw(c83.005,17.836) 83.005,18 83.75,18 R61.2@84,18
NetR62_2: R62.2 U1.G2 | length 59
  Top Layer w0.156: U1.G2@63.6,45.6 63.167,45.167 63.167,41.167 56.75,34.75 56.75,28 64,20.75 77.25,20.75 78.485,19.515 78.54,19.46 78.856,19.144 ccw(c78.972,19.26) 79.088,19.144 80.046,20.102 cw(c80.162,19.986) 80.278,20.102 80.51,19.87 cw(c80.394,19.754) 80.51,19.638 79.505,18.633 ccw(c79.621,18.517) 79.505,18.401 79.737,18.169 ccw(c79.853,18.285) 79.969,18.169 81.113,19.313 cw(c81.229,19.197) 81.345,19.313 81.577,19.081 cw(c81.461,18.965) 81.577,18.848 80.48,17.752 ccw(c80.596,17.636) 80.48,17.52 80.945,17.055 81,17 v1(81.25,16.75)
  Bottom Layer w0.156: v1(81.25,16.75) R62.2@84,16.75
NetR63_2: R63.2 U1.E2 | length 58.6
  Top Layer w0.156: U1.E2@62,45.6 61.567,45.167 61.567,42.567 54.75,35.75 54.75,27 65,16.75 v1(77.25,16.75)
  Bottom Layer w0.156: v1(77.25,16.75) 77.25,18.25 82,23 R63.2@84,23
NetR64_2: R64.2 U1.G1 | length 58.4
  Top Layer w0.156: U1.G1@63.6,44.8 63.6,40.85 57.25,34.5 57.25,28.25 63.75,21.75 77.014,21.75 77.404,21.75 ccw(c77.404,21.914) 77.569,21.914 77.569,22.536 cw(c77.733,22.536) 77.733,22.7 78.061,22.7 cw(c78.061,22.536) 78.225,22.536 78.225,21.215 ccw(c78.389,21.215) 78.389,21.051 78.717,21.051 ccw(c78.717,21.215) 78.882,21.215 78.882,22.758 cw(c79.046,22.758) 79.046,22.922 79.374,22.922 cw(c79.374,22.758) 79.538,22.758 79.538,21.215 ccw(c79.702,21.215) 79.702,21.051 80.03,21.051 ccw(c80.03,21.215) 80.195,21.215 80.195,22.758 cw(c80.359,22.758) 80.359,22.922 80.687,22.922 cw(c80.687,22.758) 80.851,22.758 80.851,21.215 ccw(c81.015,21.215) 81.015,21.051 81.343,21.051 ccw(c81.343,21.215) 81.508,21.215 81.508,21.586 cw(c81.672,21.586) 81.672,21.75 81.75,21.75 v1(82.25,21.75)
  Bottom Layer w0.156: v1(82.25,21.75) R64.2@84,21.75
NetR65_1: R65.1 U1.P7 | length 9.3
  Top Layer w0.156: U1.P7@69.2,49.6 78.4,49.6 R65.1@78.5,49.5
NetR66_1: R66.1 U1.N7 | length 10.6
  Top Layer w0.156: U1.N7@68.4,49.6 68.767,49.967 73.467,49.967 74.25,50.75 R66.1@78.5,50.75
NetR67_1: R67.1 U1.P8 | length 10
  Top Layer w0.156: U1.P8@69.2,50.4 72.9,50.4 74.5,52 R67.1@78.5,52
NetR68_1: R68.1 U1.N8 | length 11.3
  Top Layer w0.156: U1.N8@68.4,50.4 68.767,50.767 72.267,50.767 74.75,53.25 R68.1@78.5,53.25
NetR69_1: R69.1 U1.N9 | length 12
  Top Layer w0.156: U1.N9@68.4,51.2 68.833,51.633 71.633,51.633 75.75,55.75 R69.1@78.5,55.75
NetR70_1: R70.1 U1.P9 | length 10.7
  Top Layer w0.156: U1.P9@69.2,51.2 71.95,51.2 75.25,54.5 R70.1@78.5,54.5
NetR71_1: R71.1 U1.N10 | length 53
  Top Layer w0.156: U1.N10@68.4,52 68.833,52.433 70.933,52.433 83.25,64.75 113.25,64.75 v1(115.25,66.75)
NetR72_1: R72.1 U1.P11 | length 50.6
  Top Layer w0.156: U1.P11@69.2,52.8 70.55,52.8 83,65.25 112.5,65.25 v1(114,66.75)
NetR73_1: R73.1 U1.N11 | length 59.3
  Top Layer w0.156: U1.N11@68.4,52.8 68.833,53.233 70.233,53.233 79.005,62.005 79.06,62.06 ccw(c78.943,62.178) 79.06,62.295 78.129,63.227 cw(c78.246,63.344) 78.129,63.461 78.364,63.696 cw(c78.481,63.579) 78.599,63.696 79.581,62.714 ccw(c79.698,62.831) 79.816,62.714 80.051,62.949 ccw(c79.933,63.066) 80.051,63.184 79.068,64.166 cw(c79.186,64.284) 79.068,64.401 79.303,64.636 cw(c79.421,64.519) 79.538,64.636 80.521,63.654 ccw(c80.638,63.771) 80.756,63.654 80.991,63.889 ccw(c80.873,64.006) 80.991,64.124 80.077,65.037 cw(c80.195,65.155) 80.077,65.272 80.312,65.507 cw(c80.429,65.39) 80.547,65.507 81.41,64.644 ccw(c81.527,64.762) 81.644,64.644 82.271,65.271 82.75,65.75 111.75,65.75 v1(112.75,66.75)
NetR74_1: R74.1 U1.P12 | length 59.6
  Top Layer w0.156: U1.P12@69.2,53.6 69.85,53.6 74,57.75 74,60.5 74,60.611 ccw(c73.716,60.611) 73.917,60.811 73.672,61.056 cw(c73.789,61.174) 73.672,61.291 73.907,61.526 cw(c74.024,61.409) 74.142,61.526 75.283,60.385 ccw(c75.4,60.503) 75.518,60.385 75.752,60.62 ccw(c75.635,60.738) 75.752,60.855 74.612,61.996 cw(c74.729,62.113) 74.612,62.231 74.847,62.466 cw(c74.964,62.348) 75.082,62.466 76.222,61.325 ccw(c76.34,61.442) 76.457,61.325 76.692,61.56 ccw(c76.575,61.677) 76.692,61.795 75.551,62.936 cw(c75.669,63.053) 75.551,63.171 75.786,63.406 cw(c75.904,63.288) 76.021,63.406 76.931,62.496 ccw(c77.048,62.614) 77.166,62.496 77.401,62.731 ccw(c77.283,62.849) 77.401,62.966 76.926,63.441 cw(c77.043,63.558) 76.926,63.676 77.503,64.253 79.5,66.25 111,66.25 v1(111.5,66.75)
NetR75_1: R75.1 U1.P10 | length 59.7
  Top Layer w0.156: U1.P10@69.2,52 71.25,52 83.5,64.25 114,64.25 116,66.25 116,67 115.5,67.5 111,67.5 v1(110.25,66.75)
NetR76_1: R76.1 U1.N12 | length 59.2
  Top Layer w0.156: U1.N12@68.4,53.6 68.8,54 69.5,54 73,57.5 73,62.75 73,62.861 ccw(c72.716,62.861) 72.917,63.061 72.42,63.558 cw(c72.537,63.676) 72.42,63.793 72.655,64.028 cw(c72.772,63.911) 72.89,64.028 73.906,63.012 ccw(c74.024,63.129) 74.141,63.012 74.376,63.247 ccw(c74.259,63.364) 74.376,63.482 73.36,64.498 cw(c73.477,64.616) 73.36,64.733 73.594,64.968 cw(c73.712,64.851) 73.829,64.968 74.846,63.952 ccw(c74.963,64.069) 75.081,63.952 75.316,64.186 ccw(c75.198,64.304) 75.316,64.421 74.299,65.438 cw(c74.417,65.555) 74.299,65.673 74.534,65.908 cw(c74.652,65.79) 74.769,65.908 75.673,65.004 ccw(c75.79,65.122) 75.908,65.004 76.143,65.239 ccw(c76.025,65.357) 76.143,65.474 75.691,65.926 cw(c75.808,66.043) 75.691,66.161 75.926,66.396 cw(c76.043,66.278) 76.161,66.396 ccw(c76.278,66.513) 76.396,66.396 76.75,66.75 76.91,66.75 v1(109,66.75)
NetU4_REG_1_5: U4_REG_1.5
NetU4_REG_2_5: U4_REG_2.5
NetU4_REG_3_5: U4_REG_3.5
NetU6_2: U6.2
NetU6_8: U6.8
NetU6_9: U6.9
NetU6_10: U6.10
NetU6_11: U6.11
NetU6_12: U6.12
NetU6_13: U6.13
NetU6_14: U6.14
NetU6_17: U6.17
NetU6_23: U6.23
NetU6_24: U6.24
NetU6_25: U6.25
NetU6_26: U6.26
NetU6_30: U6.30
NetU6_33: U6.33
NetU6_34: U6.34
NetU6_35: U6.35
NetU6_36: U6.36
NetU6_37: U6.37
NetU6_38: U6.38
NetU6_39: U6.39
NetU6_40: U6.40
NetU6_41: U6.41
NetU6_42: U6.42
NetU6_43: U6.43
NetU6_44: U6.44
NetU6_45: U6.45
NetU6_46: U6.46
NetU6_51: U6.51
NetU6_52: U6.52
NetU6_53: U6.53
NetU6_54: U6.54
NetU6_55: U6.55
NetU6_57: U6.57
NetU6_58: U6.58
NetU6_59: U6.59
NetU6_60: U6.60
P1_GND: C2.1 C3.1 C4.1 C5.1 J4.3 | length 4.1
  Top Layer w0.5: C2.1@12.479,94 13.5,94 ; C5.1@12.479,102 13.5,102 ; 24.5,94 C3.1@25.521,94 ; 24.5,102 C4.1@25.521,102
P1_TRX_N: C65_PHY_1.2 D4.4 D4.7 J4.1 R11_PHY_1.2 | length 8
  Bottom Layer w0.123: J4.1@18,100 18.766,100 18.838,99.928 18.838,97.923 18.728,97.813 18.713,97.813 18.5,97.6 D4.7@18.5,97.417 D4.4@18.5,96.582 18.5,96.4 18.713,96.187 18.728,96.187 18.838,96.077 18.838,93.801 18.766,93.729 18.5,93.729 C65_PHY_1.2@18.25,93.479
P1_TRX_P: C64_PHY_1.2 D4.2 D4.9 J4.2 R12_PHY_1.2 | length 8
  Bottom Layer w0.123: C64_PHY_1.2@19.75,93.479 19.5,93.729 19.234,93.729 19.162,93.801 19.162,96.077 19.272,96.187 19.287,96.187 19.5,96.4 D4.2@19.5,96.582 D4.9@19.5,97.417 19.5,97.6 19.287,97.813 19.272,97.813 19.162,97.923 19.162,99.928 19.234,100 J4.2@20,100
P2_GND: C7.1 C9.1 C11.1 C13.1 J5.3 | length 4.1
  Top Layer w0.5: C7.1@42.479,94 43.5,94 ; C13.1@42.479,102 43.5,102 ; 54.5,94 C11.1@55.521,94 ; 54.5,102 C9.1@55.521,102
P2_TRX_N: C65_PHY_2.2 D5.4 D5.7 J5.1 R11_PHY_2.2 | length 8
  Bottom Layer w0.123: J5.1@48,100 48.766,100 48.838,99.928 48.838,97.923 48.728,97.813 48.713,97.813 48.5,97.6 D5.7@48.5,97.417 D5.4@48.5,96.582 48.5,96.4 48.713,96.187 48.728,96.187 48.838,96.077 48.838,93.801 48.766,93.729 48.5,93.729 C65_PHY_2.2@48.25,93.479
P2_TRX_P: C64_PHY_2.2 D5.2 D5.9 J5.2 R12_PHY_2.2 | length 8
  Bottom Layer w0.123: C64_PHY_2.2@49.75,93.479 49.5,93.729 49.234,93.729 49.162,93.801 49.162,96.077 49.272,96.187 49.287,96.187 49.5,96.4 D5.2@49.5,96.582 D5.9@49.5,97.417 49.5,97.6 49.287,97.813 49.272,97.813 49.162,97.923 49.162,99.928 49.234,100 J5.2@50,100
P3_GND: C14.1 C15.1 C16.1 C17.1 J6.3 | length 4.1
  Top Layer w0.5: C16.1@72.479,94 73.5,94 ; C17.1@72.479,102 73.5,102 ; 84.5,94 C14.1@85.521,94 ; 84.5,102 C15.1@85.521,102
P3_TRX_N: C65_PHY_3.2 D6.4 D6.7 J6.1 R11_PHY_3.2 | length 8
  Bottom Layer w0.123: J6.1@78,100 78.766,100 78.838,99.928 78.838,97.923 78.728,97.813 78.713,97.813 78.5,97.6 D6.7@78.5,97.417 D6.4@78.5,96.582 78.5,96.4 78.713,96.187 78.728,96.187 78.838,96.077 78.838,93.801 78.766,93.729 78.5,93.729 C65_PHY_3.2@78.25,93.479
P3_TRX_P: C64_PHY_3.2 D6.2 D6.9 J6.2 R12_PHY_3.2 | length 8
  Bottom Layer w0.123: C64_PHY_3.2@79.75,93.479 79.5,93.729 79.234,93.729 79.162,93.801 79.162,96.077 79.272,96.187 79.287,96.187 79.5,96.4 D6.2@79.5,96.582 D6.9@79.5,97.417 79.5,97.6 79.287,97.813 79.272,97.813 79.162,97.923 79.162,99.928 79.234,100 J6.2@80,100
P4_GND: C18.1 C19.1 C20.1 C21.1 J7.3 | length 4.1
  Top Layer w0.5: C20.1@102.479,94 103.5,94 ; C21.1@102.479,102 103.5,102 ; 114.5,94 C18.1@115.521,94 ; 114.5,102 C19.1@115.521,102
P4_TRX_N: C65_PHY_4.2 D7.4 D7.7 J7.1 R11_PHY_4.2 | length 8
  Bottom Layer w0.123: J7.1@108,100 108.766,100 108.838,99.928 108.838,97.923 108.728,97.813 108.713,97.813 108.5,97.6 D7.7@108.5,97.417 D7.4@108.5,96.582 108.5,96.4 108.713,96.187 108.728,96.187 108.838,96.077 108.838,93.801 108.766,93.729 108.5,93.729 C65_PHY_4.2@108.25,93.479
P4_TRX_P: C64_PHY_4.2 D7.2 D7.9 J7.2 R12_PHY_4.2 | length 8
  Bottom Layer w0.123: C64_PHY_4.2@109.75,93.479 109.5,93.729 109.234,93.729 109.162,93.801 109.162,96.077 109.272,96.187 109.287,96.187 109.5,96.4 D7.2@109.5,96.582 D7.9@109.5,97.417 109.5,97.6 109.287,97.813 109.272,97.813 109.162,97.923 109.162,99.928 109.234,100 J7.2@110,100
RJ45_GND: C1.2 C6.1 C8.1 C10.1 C12.1 J3.P1 J3.S1 J3.S2 | length 4.1
  Top Layer w0.5: C8.1@108.479,12 109.5,12 ; C10.1@108.479,24 109.5,24 ; C12.1@121,7.479 121,8.5 ; 121,27.5 C6.1@121,28.521
  other v1: 118,17.365
SJA1150Q_X25_N: C23.1 U1.L1 Y1.3 | length 9
  Top Layer w0.156: Y1.3@66,36.65 66.1,36.65 66.975,37.525 66.975,39.854 66.858,39.971 66.858,39.992 C23.1@66.6,40.25 ; U1.L1@66.8,44.8 66.8,44.766 66.98,44.587 66.98,40.651 66.858,40.529 66.858,40.508 C23.1@66.6,40.25 ; C23.1@66.6,40.25 C23.1@66.579,40.25 C23.1@66.6,40.25
SJA1150Q_X25_P: C22.1 U1.K2 Y1.1 | length 10.1
  Top Layer w0.156: U1.K2@66,45.6 66.397,45.203 66.916,45.203 67.225,44.894 67.225,40.646 67.342,40.529 67.342,40.508 67.6,40.25 C22.1@67.621,40.25 67.363,39.992 67.314,39.992 67.223,39.9 67.223,37.92 67.314,37.828 67.678,37.828 Y1.1@68.2,38.35
STM32_G_LED: D10.1 U6.61 | length 19.2
  Top Layer w0.2: U6.61@102.75,43.25 103.909,43.25 106.75,46.091 106.75,51.25 110.05,54.55 D10.1@114.2,54.55
STM32_R_LED: D10.4 U6.62 | length 19.3
  Top Layer w0.2: U6.62@102.75,43.75 104,43.75 106.461,46.211 106.461,51.37 110.541,55.45 D10.4@114.2,55.45
STM32_RESETN: C135.1 J9.10 R53.1 R54.2 U6.7 | length 27.2
  Top Layer w0.2: v1(96.25,48.25) 96.307,48.193 97.057,48.193 97.738,47.512 97.738,46.762 U6.7@97.75,46.75 ; C135.1@110.521,52 110.35,51.829 R54.2@110.35,49 v1(110.35,47.172) 112.432,45.089 112.432,43.76 112.653,43.54 J9.10@113.27,43.54
  Mid Layer 2 w0.2: v1(96.25,48.25) 109.272,48.25 v1(110.35,47.172)
STM32_SWCLK: J9.4 R52.1 U6.50 | length 11.3
  Top Layer w0.2: U6.50@102.75,37.75 104,37.75 105.98,39.73 107,39.73 J9.4@113.27,39.73
STM32_SWDIO: J9.2 U6.49 | length 11
  Top Layer w0.2: U6.49@102.75,37.25 108.25,37.25 109.46,38.46 J9.2@113.27,38.46
STM32_SWO: J9.6 U6.56 | length 10.6
  Top Layer w0.2: U6.56@102.75,40.75 103.75,40.75 104,41 J9.6@113.27,41
STM32_VDDA: C141.1 C142.1 C145.1 C146.1 FB23.2 U6.28 U6.29
  other v1: 93.25,39.5 93.25,40.5
STM32_X25_N: C132.1 U6.6 Y4.3 | length 8.3
  Top Layer w0.2: Y4.3@95.65,52.4 96.15,52.9 96.15,52.014 96.25,51.914 96.488,51.914 96.606,51.797 96.606,50.853 96.488,50.736 96.465,50.736 C132.1@96.229,50.5 96.465,50.264 96.488,50.264 96.606,50.147 96.606,49.744 98.356,47.994 98.356,47.529 98.302,47.476 98.302,46.802 U6.6@98.25,46.75
STM32_X25_P: C131.1 U6.5 Y4.1 | length 8.9
  Top Layer w0.2: Y4.1@97.85,54.1 97.75,54.1 96.894,53.244 96.894,50.853 97.012,50.736 97.035,50.736 C131.1@97.271,50.5 97.035,50.264 97.012,50.264 96.894,50.147 96.894,49.864 98.644,48.114 98.644,47.529 98.698,47.476 98.698,46.802 U6.5@98.75,46.75
STM32_X32_N: C134.1 U6.4 Y5.2 | length 7.5
  Top Layer w0.2: U6.4@99.25,46.75 99.302,46.802 99.302,47.476 99.356,47.529 99.356,47.997 101.106,49.747 101.106,50.147 100.988,50.264 100.965,50.264 C134.1@100.729,50.5 100.965,50.736 100.988,50.736 101.106,50.853 101.106,52.275 101.025,52.356 101.025,52.813 Y5.2@100.837,53
STM32_X32_P: C133.1 U6.3 Y5.1 | length 7.5
  Top Layer w0.2: U6.3@99.75,46.75 99.698,46.802 99.698,47.476 99.644,47.529 99.644,47.877 101.394,49.627 101.394,50.147 101.512,50.264 101.535,50.264 C133.1@101.771,50.5 101.535,50.736 101.512,50.736 101.394,50.853 101.394,52.275 101.475,52.356 101.475,52.813 Y5.1@101.663,53
SW_VDD_CORE: C34.1 C35.1 C36.1 C37.1 C38.1 C39.1 C40.1 C41.1 C42.1 C43.1 FB1.2 U1.D6 U1.D9 U1.F4 U1.F11 U1.J4 U1.J11 U1.L6 U1.L9 | length 0.8
  Top Layer w0.3: v2@62.519,53.481 62.8,53.2 U1.F11@62.8,52.8
  other v1: 70.5,37.5 71.5,37.5 70.5,38.5 71.5,38.5
  other v2: 62.8,47.2 65.2,47.2 61.2,48.8 66.8,48.8 61.2,51.2 66.8,51.2 65.2,52.8 62.5,53.5
SW_VDDA_OSC: C28.1 C29.1 C30.1 FB4.2 U1.K1
  other v1: 66,42.75
SW_VDDA_PLL: C31.1 C32.1 C33.1 FB7.2 U1.J1
  other v1: 65,42.75
SW_VDDIO_CLO: C24.1 C25.1 FB5.2 U1.L5 | length 0.9
  Top Layer w0.3: U1.L5@66.8,48 66.819,47.981 67.019,47.981 v2@67.481,47.519
  other v2: 67.5,47.5
SW_VDDIO_HOST: C26.1 C27.1 FB2.2 U1.H4
  other v2: 64.4,47.2
SW_VDDIO_MII0: C44.1 C45.1 C46.1 C47.1 FB3.2 U1.D4 U1.E4 U1.G4 | length 2.5
  Top Layer w0.3: v2(61,46.5) 61,46.527 61.181,46.708 61.181,47.181 U1.D4@61.2,47.2 ; U1.E4@62,47.2 62.019,47.181 62.019,46.981 v2@62.481,46.519 ; U1.G4@63.6,47.2 63.61,47.19 63.61,46.89 v2@63.981,46.519
  other v2: 62.5,46.5 64,46.5
SW_VDDIO_MII1: C48.1 C49.1 C50.1 C51.1 FB6.2 U1.D5 U1.D7 U1.D8 | length 2.8
  Top Layer w0.3: v2(60.5,49) 60.5,49.424 60.676,49.6 U1.D7@61.2,49.6 ; v2@60.519,47.519 60.981,47.981 61.181,47.981 U1.D5@61.2,48 ; v2@60.527,50.5 61.073,50.5 61.173,50.4 U1.D8@61.2,50.4
  other v2: 60.5,47.5 60.5,50.5
SW_VDDIO_MII2: C52.1 C53.1 C54.1 C55.1 FB8.2 U1.D10 U1.D11 U1.E11
  other v2: 60.5,52 61,53.5
SW_VDDIO_MII3: C56.1 C57.1 C58.1 C59.1 FB9.2 U1.G11 U1.H11 U1.K11 | length 2.5
  Top Layer w0.3: U1.G11@63.6,52.8 63.619,52.819 63.619,53.092 v2@64,53.473 ; v2(64,53.5) v2@64,53.473 ; U1.H11@64.4,52.8 64.381,52.819 64.381,53.092 v2@64,53.473 ; v2(65.75,53.5) 65.75,53.473 65.981,53.242 65.981,52.819 U1.K11@66,52.8
SW_VDDIO_MII4: C60.1 C61.1 C62.1 C63.1 FB10.2 U1.L8 U1.L10 U1.L11
  other v2: 66.8,50.4 67.5,52
TRX_PHY_1_N: L1_PHY_1.2 U2_PHY_1.42 | length 3.3
  Bottom Layer w0.123: L1_PHY_1.2@18.5,86.475 18.5,86.25 18.738,86.012 18.766,86.012 18.838,85.939 18.838,83.823 18.75,83.734 U2_PHY_1.42@18.75,83.4
TRX_PHY_1_P: L1_PHY_1.1 U2_PHY_1.43 | length 3.3
  Bottom Layer w0.123: U2_PHY_1.43@19.25,83.4 19.25,83.734 19.162,83.823 19.162,85.939 19.234,86.012 19.262,86.012 19.5,86.25 L1_PHY_1.1@19.5,86.475
TRX_PHY_2_N: L1_PHY_2.2 U2_PHY_2.42 | length 3.3
  Bottom Layer w0.123: L1_PHY_2.2@48.5,86.475 48.5,86.25 48.738,86.012 48.766,86.012 48.838,85.939 48.838,83.823 48.75,83.734 U2_PHY_2.42@48.75,83.4
TRX_PHY_2_P: L1_PHY_2.1 U2_PHY_2.43 | length 3.3
  Bottom Layer w0.123: U2_PHY_2.43@49.25,83.4 49.25,83.734 49.162,83.823 49.162,85.939 49.234,86.012 49.262,86.012 49.5,86.25 L1_PHY_2.1@49.5,86.475
TRX_PHY_3_N: L1_PHY_3.2 U2_PHY_3.42 | length 3.3
  Bottom Layer w0.123: L1_PHY_3.2@78.5,86.475 78.5,86.25 78.738,86.012 78.766,86.012 78.838,85.939 78.838,83.823 78.75,83.734 U2_PHY_3.42@78.75,83.4
TRX_PHY_3_P: L1_PHY_3.1 U2_PHY_3.43 | length 3.3
  Bottom Layer w0.123: U2_PHY_3.43@79.25,83.4 79.25,83.734 79.162,83.823 79.162,85.939 79.234,86.012 79.262,86.012 79.5,86.25 L1_PHY_3.1@79.5,86.475
TRX_PHY_4_N: L1_PHY_4.2 U2_PHY_4.42 | length 3.3
  Bottom Layer w0.123: L1_PHY_4.2@108.5,86.475 108.5,86.25 108.738,86.012 108.766,86.012 108.838,85.939 108.838,83.823 108.75,83.734 U2_PHY_4.42@108.75,83.4
TRX_PHY_4_P: L1_PHY_4.1 U2_PHY_4.43 | length 3.3
  Bottom Layer w0.123: U2_PHY_4.43@109.25,83.4 109.25,83.734 109.162,83.823 109.162,85.939 109.234,86.012 109.262,86.012 109.5,86.25 L1_PHY_4.1@109.5,86.475
TRX_TERM_PHY_1_N: C65_PHY_1.1 L1_PHY_1.3 | length 3.6
  Bottom Layer w0.123: C65_PHY_1.1@18.25,92.521 18.5,92.271 18.766,92.271 18.838,92.199 18.838,90.061 18.766,89.988 18.738,89.988 18.5,89.75 L1_PHY_1.3@18.5,89.525
TRX_TERM_PHY_1_P: C64_PHY_1.1 L1_PHY_1.4 | length 3.6
  Bottom Layer w0.123: L1_PHY_1.4@19.5,89.525 19.5,89.75 19.262,89.988 19.234,89.988 19.162,90.061 19.162,92.199 19.234,92.271 19.5,92.271 C64_PHY_1.1@19.75,92.521
TRX_TERM_PHY_2_N: C65_PHY_2.1 L1_PHY_2.3 | length 3.6
  Bottom Layer w0.123: C65_PHY_2.1@48.25,92.521 48.5,92.271 48.766,92.271 48.838,92.199 48.838,90.061 48.766,89.988 48.738,89.988 48.5,89.75 L1_PHY_2.3@48.5,89.525
TRX_TERM_PHY_2_P: C64_PHY_2.1 L1_PHY_2.4 | length 3.6
  Bottom Layer w0.123: L1_PHY_2.4@49.5,89.525 49.5,89.75 49.262,89.988 49.234,89.988 49.162,90.061 49.162,92.199 49.234,92.271 49.5,92.271 C64_PHY_2.1@49.75,92.521
TRX_TERM_PHY_3_N: C65_PHY_3.1 L1_PHY_3.3 | length 3.6
  Bottom Layer w0.123: C65_PHY_3.1@78.25,92.521 78.5,92.271 78.766,92.271 78.838,92.199 78.838,90.061 78.766,89.988 78.738,89.988 78.5,89.75 L1_PHY_3.3@78.5,89.525
TRX_TERM_PHY_3_P: C64_PHY_3.1 L1_PHY_3.4 | length 3.6
  Bottom Layer w0.123: L1_PHY_3.4@79.5,89.525 79.5,89.75 79.262,89.988 79.234,89.988 79.162,90.061 79.162,92.199 79.234,92.271 79.5,92.271 C64_PHY_3.1@79.75,92.521
TRX_TERM_PHY_4_N: C65_PHY_4.1 L1_PHY_4.3 | length 3.6
  Bottom Layer w0.123: C65_PHY_4.1@108.25,92.521 108.5,92.271 108.766,92.271 108.838,92.199 108.838,90.061 108.766,89.988 108.738,89.988 108.5,89.75 L1_PHY_4.3@108.5,89.525
TRX_TERM_PHY_4_P: C64_PHY_4.1 L1_PHY_4.4 | length 3.6
  Bottom Layer w0.123: L1_PHY_4.4@109.5,89.525 109.5,89.75 109.262,89.988 109.234,89.988 109.162,90.061 109.162,92.199 109.234,92.271 109.5,92.271 C64_PHY_4.1@109.75,92.521
VCC: C125.1 C126.1 C127.1 C128.1 D1.1 J10.1 Q1.1 Q1.2 Q1.3 U5.2 U5.13 U5.14 | length 10.2
  Top Layer w0.5: J10.1@20,59.5 20,59.329 21,58.329 v1(21,49.75)
  other v1: 19.5,35.25 19.5,36 22.25,36 19.5,36.75 19.5,45.25 19.5,46 22.25,46 19.5,46.75
VDDIO_8830: C96.1 C97.1 C98.1 C99.1 C100.1 C101.1 FB18.2 R30.1 R31.1 R32.1 R33.1 U3.17 U3.24 U3.28 U3.35 U3.41 | length 15.5
  Top Layer w0.2: v1(83.75,24) 83.75,23.1 R33.1@83.85,23
  Mid Layer 3 w0.3: v1(83.75,24) 87.75,24 v1(90,21.75) ; v1(97,12) 99.5,12 v1(101.5,10)
  Bottom Layer w0.2: C97.1@97,11.729 97,11.707 97.236,11.471 97.554,11.471 98.425,10.6 R32.1@98.5,10.6
  other v1: 91.75,12 90,16.25 94.75,24
pads on no net: D4.1 D4.5 D4.6 D4.10 D5.1 D5.5 D5.6 D5.10 D6.1 D6.5 D6.6 D6.10 D7.1 D7.5 D7.6 D7.10 J3. J8.7 J8.9 J9.7 J9.8 J9.9 U1.A3 U1.A10 U1.F14 U1.H1 U1.N4 U1.N14 U1.P6 U2_PHY_1.2 U2_PHY_1.33 U2_PHY_1.34 U2_PHY_1.38 U2_PHY_1.40 U2_PHY_2.2 U2_PHY_2.33 U2_PHY_2.34 U2_PHY_2.38 U2_PHY_2.40 U2_PHY_3.2 U2_PHY_3.33 U2_PHY_3.34 U2_PHY_3.38 U2_PHY_3.40 U2_PHY_4.2 U2_PHY_4.33 U2_PHY_4.34 U2_PHY_4.38 U2_PHY_4.40 U3.14 U3.37 U3.38 U3.39 U3.42 U3.44 U5.10

## Polygon pours and split planes (outlines as drawn)
GND on Bottom Layer "GND_L06_P243" (solid, remove dead copper, pour order 243): 0,4 0,106 cw(c4,106) 4,110 124,110 cw(c124,106) 128,106 128,4 cw(c124,4) 124,0 4,0 cw(c4,4)
3V3 on Bottom Layer "3V3_L06_P059" (solid, remove dead copper, pour order 59): 66.25,45 67.75,45 67.75,44.5 72,44.5 72,51.5 73.75,51.5 73.75,43.25 66.25,43.25